# Altium PCB VlakecDuplo.PcbDoc
Units mm, origin at the board's own origin, x right, y up, seen from the top; angles counter-clockwise.
Board outline 27 x 30 mm, 2 copper layers (Top Layer, Bottom Layer); 26 components, 24 nets, 102 pads, 25 vias.
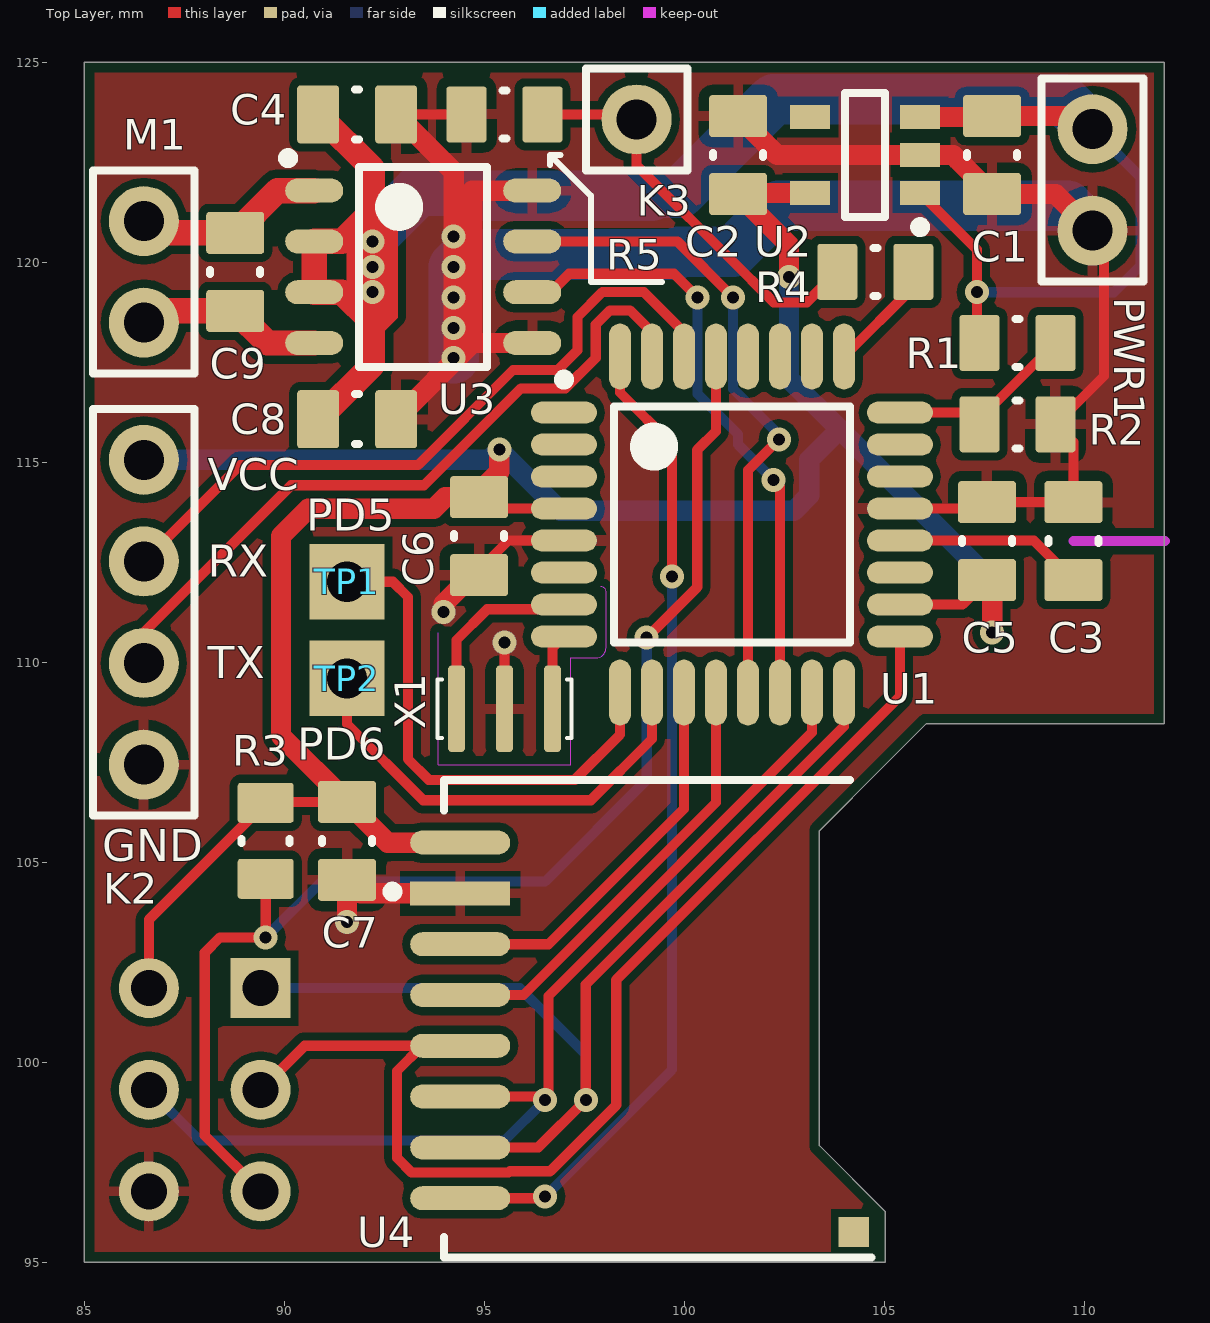
[diagram p0: Top Layer view]
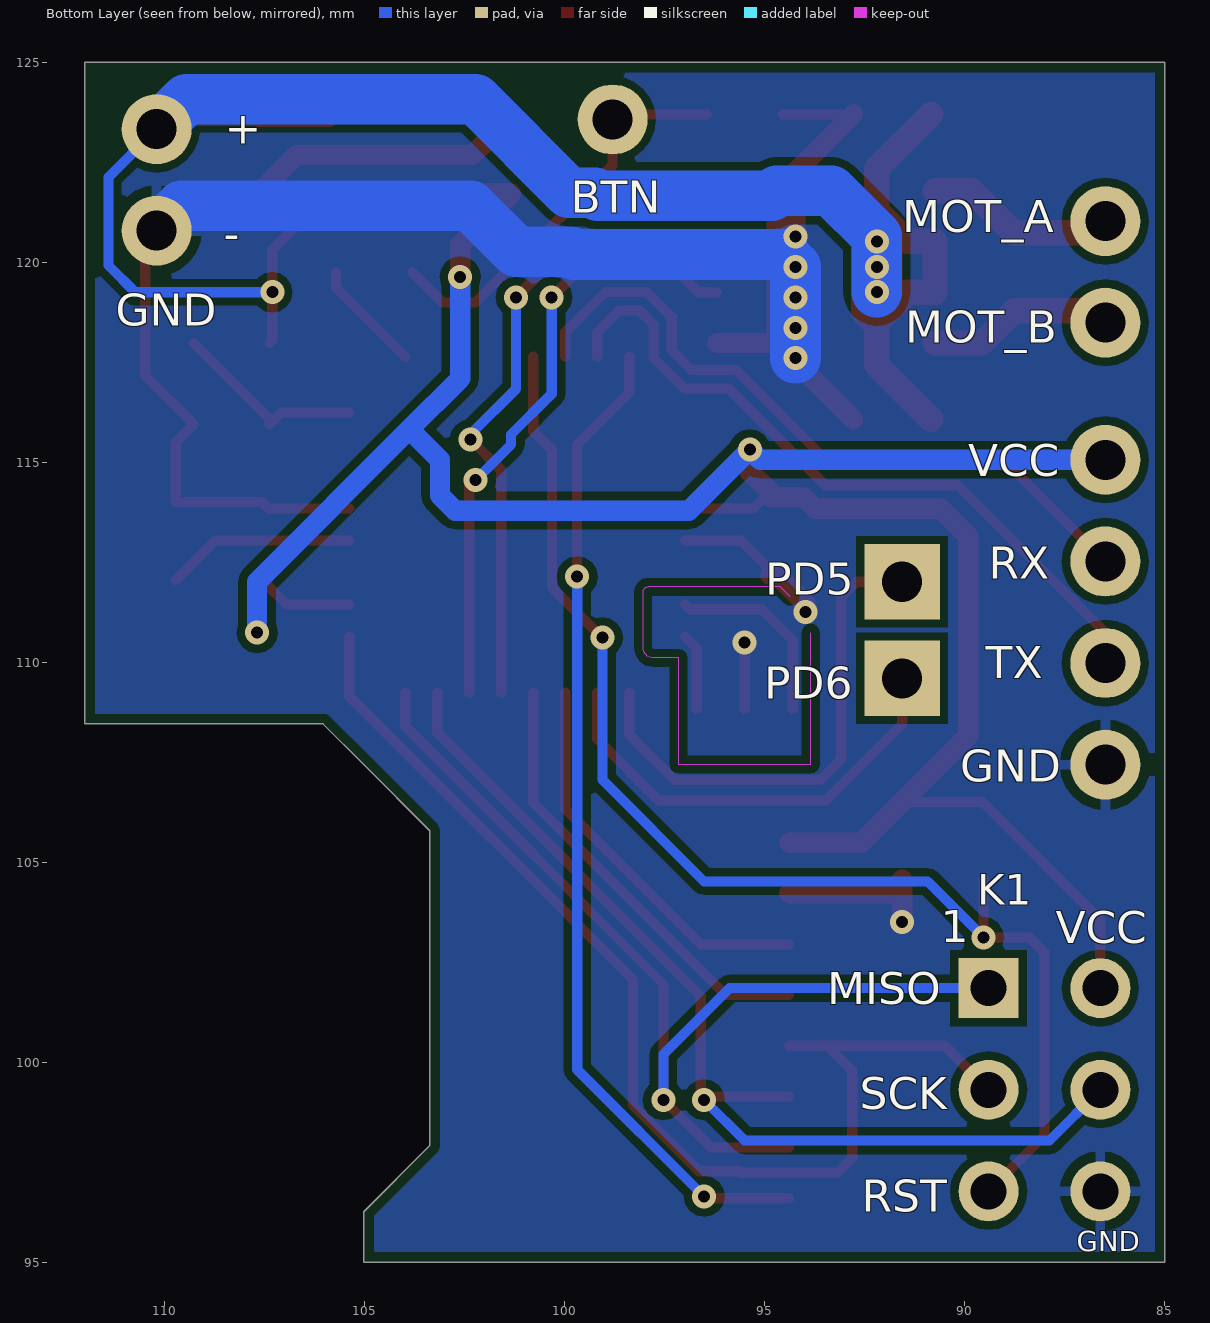
[diagram p1: Bottom Layer view, seen from below]

## Layer stack, top to bottom
Top Solder: solder mask 0.0102, Solder Resist, Dk 3.5
Top Layer: signal copper 0.0356
Dielectric 1: dielectric 0.32, FR-4, Dk 4.8
Bottom Layer: signal copper 0.0356
Bottom Solder: solder mask 0.0102, Solder Resist, Dk 3.5

## Board outline
85,95 85,125 112,125 112,108.458 106.045,108.458 105.029,107.442 103.378,105.791 103.378,97.917 105.029,96.266 105.029,95

## Design rules (kind name [scope] priority, off if disabled: settings)
BoardOutlineClearance [All] p1: gap=0.254 ignorepadtopadclearanceinfootprint=FALSE
Clearance [All] p1: gap=0.203 ignorepadtopadclearanceinfootprint=FALSE
ComponentClearance ComponentClearance_ISP [InComponent('K1')] p1: gap=0 collisioncheckmode=3 verticalgap=0 showdistances=FALSE
ComponentClearance [All] p2: gap=0.254 collisioncheckmode=3 verticalgap=0.254 showdistances=FALSE
HoleSize [All] p1: absolutevalues=TRUE maxlimit=25.4 minlimit=0.025 maxpercent=80.000 minpercent=20.000
HoleToHoleClearance [All] p1: gap=0.152 allowstackedmicrovias=TRUE
MinimumSolderMaskSliver [All] p1: minsoldermaskwidth=0.152
PolygonConnect [All] p1: thpad.connectstyle=Relief thpad.reliefconductorwidth=0.254 thpad.reliefentries=4 thpad.polygonreliefangle="90 Angle" thpad.airgapwidth=0.254 smdpad.connectstyle=Relief smdpad.reliefconductorwidth=0.254 smdpad.reliefentries=4 smdpad.polygonreliefangle="90 Angle" smdpad.airgapwidth=0.254 via.connectstyle=Direct via.reliefconductorwidth=0.254 via.reliefentries=4 via.polygonreliefangle="90 Angle" via.airgapwidth=0.254
RoutingVias [All] p1: holewidth=0.3 width=0.6 viastyle="Through Hole" minholewidth=0.3 minwidth=0.6 maxholewidth=0.711 maxwidth=1.27
SilkToSilkClearance [All] p1: silktosilkclearance=0.152
SilkToSolderMaskClearance [IsPad] p1: minsilkscreentomaskgap=0.152 clearancetoexposedcopper=TRUE
SolderMaskExpansion [All] p1: expansion=0.102
Width [All] p1: maxlimit=1.27 minlimit=0.254 preferedwidth=0.254
24 further rules are at their usual default settings.

## Components (designator, comment, footprint, x,y, rotation, side; value= is the part's Value field where it differs from the comment)
C1 "1u" C0805(2012)_N 107.696,122.682 r270 top
C2 "1u" C0805(2012)_N 101.346,122.682 r90 top
C3 "100n" C0805(2012)_N 109.728,113.03 r90 top
C4 "2.2u" C0805(2012)_N 91.821,123.698 r0 top
C5 "100n" C0805(2012)_N 107.569,113.03 r90 top
C6 "100n" C0805(2012)_N 94.869,113.157 r270 top
C7 "2.2u" C0805(2012)_N 91.567,105.537 r270 top
C8 "2.2u" C0805(2012)_N 91.821,116.078 r0 top
C9 "100n" C0805(2012)_N 88.773,119.761 r270 top
K1 "H2x3" H2X3_SPEEDY 89.281,101.854 r270 bottom
K2 "H1x4" H1x4 86.487,115.062 r90 top
K3 "H1x1" H1x1 98.806,123.571 r0 top
M1 "H1x2" H1x2 86.487,121.031 r90 top
PWR1 "H1x2" H1x2 110.205,123.33 r90 top
R1 "10k" R0805(2012)_N 108.331,117.983 r0 top
R2 "3k" R0805(2012)_N 108.331,115.951 r0 top
R3 "100k" R0805(2012)_N 89.535,105.537 r90 top
R4 "330" R0805(2012)_N 104.775,119.761 r0 top
R5 "10k" R0805(2012)_N 95.504,123.698 r180 top
TP1 "PD5" PAD_HOLE 91.567,112.014 r0 top
TP2 "PD6" PAD_HOLE 91.567,109.601 r0 top
U1 "ATmega328PB-AU" 32A_N 101.191,113.444 r0 top
U2 "MIC5504-3.3" SOT23-5 104.521,122.682 r180 top
U3 "L9110" SOP-8 93.472,119.888 r0 top
U4 "NRF24L01+" NRF24L01+smd_module 102.997,101.092 r0 top
X1 "8MHz" RESONATOR_3213met_L 95.504,108.839 r180 top

## Footprints (in the part's own frame and the unit in brackets; to place one, negate y for a bottom-side part, rotate by r counter-clockwise, add the part's x,y. Pads: shape width x height; smd on the part's side, far side on the other; paste and mask are expansions set on the pad)
32A_N [mm]
  oval 1.65x0.55 smd: 1(-4.2,2.8) 2(-4.2,2) 3(-4.2,1.2) 4(-4.2,0.4) 5(-4.2,-0.4) 6(-4.2,-1.2) 7(-4.2,-2) 8(-4.2,-2.8) 17(4.2,-2.8) 18(4.2,-2) 19(4.2,-1.2) 20(4.2,-0.4) 21(4.2,0.4) 22(4.2,1.2) 23(4.2,2) 24(4.2,2.8)
  oval 0.55x1.65 smd: 9(-2.8,-4.2) 10(-2,-4.2) 11(-1.2,-4.2) 12(-0.4,-4.2) 13(0.4,-4.2) 14(1.2,-4.2) 15(2,-4.2) 16(2.8,-4.2) 25(2.8,4.2) 26(2,4.2) 27(1.2,4.2) 28(0.4,4.2) 29(-0.4,4.2) 30(-1.2,4.2) 31(-2,4.2) 32(-2.8,4.2)
  silkscreen extent -4.32,-2.95 2.95,3.75, body extent -3.5,-3.5 3.5,3.5, height 1.2
C0805(2012)_N [mm] "Chip Capacitor, 2-Leads, Body 2.05x1.25mm, IPC Medium Density"
  rrect15% 1.05x1.45 smd: 1(-0.975,0) 2(0.975,0)
  silkscreen extent -0.05,-0.63 0.05,0.63, body extent -1.1,-0.7 1.1,0.7, height 1.4
H1x1 [mm]
  round 1.75 hole 1: 1(0,0)
  silkscreen extent -1.27,-1.27 1.27,1.27, body extent -1.27,-1.27 1.27,1.27, height 8.4
H1x2 [mm]
  round 1.75 hole 1: 1(0,0) 2(-2.54,0)
  silkscreen extent -3.81,-1.27 1.27,1.27, body extent -3.81,-1.27 1.27,1.27, height 8.4
H1x4 [mm]
  round 1.75 hole 1: 1(0,0) 2(-2.54,0) 3(-5.08,0) 4(-7.62,0)
  silkscreen extent -8.89,-1.27 1.27,1.27, body extent -8.89,-1.27 1.27,1.27, height 8.4
H2X3_SPEEDY [mm]
  rect 1.5x1.5 hole 0.9: 1(0,-0.127)
  round 1.5 hole 0.9: 2(0,2.667) 3(2.54,-0.127) 4(2.54,2.667) 5(5.08,-0.127) 6(5.08,2.667)
  body extent -5.08,-3.18 10.16,6.02, height 9.45
NRF24L01+smd_module [mm]
  rect 2.5x0.6 smd: 1(-8.6,3.131)
  oval 2.5x0.6 smd: 2(-8.6,4.401) 3(-8.6,1.861) 4(-8.6,0.591) 5(-8.6,-0.679) 6(-8.6,-1.949) 7(-8.6,-3.219) 8(-8.6,-4.489)
  rect 0.762x0.762 smd: 9(1.245,-5.334)
  silkscreen extent -10.42,-5.97 1.68,5.97, body extent -9,-6 9,6, height 0.8
PAD_HOLE [mil]
  rect 74x74 hole 39.4: 1(0,0)
R0805(2012)_N [mm] "Chip Resistor, 2-Leads, Body 2.05x1.25mm, IPC Medium Density"
  rrect15% 1x1.4 smd: 1(-0.95,0) 2(0.95,0)
  silkscreen extent -0.05,-0.6 0.05,0.6, body extent -1.1,-0.7 1.1,0.7, height 0.8
RESONATOR_3213met_L [mm] "Oscillator, Side Concave, 1.20 mm pitch; 6 pin, 3.20 mm L X 1.30 mm W X 0.80 mm H body"
  rrect51% 0.43x2.17 smd: 1(-1.2,0) 2(0,0) 3(1.2,0)
  silkscreen extent -1.68,-0.73 1.68,0.73, body extent -1.6,-0.7 1.6,0.7, height 0.8
SOP-8 [mm] "SOIC, 8-Leads, Body 4.90x3.90mm, Pitch 1.27mm, IPC Medium Density"
  oval 1.45x0.6 smd: 1(-2.725,1.905) 2(-2.725,0.635) 3(-2.725,-0.635) 4(-2.725,-1.905) 5(2.725,-1.905) 6(2.725,-0.635) 7(2.725,0.635) 8(2.725,1.905)
  silkscreen extent -3.5,-2.5 1.6,2.84, body extent -3,-2.5 3,2.5, height 1.75
SOT23-5 [mm] "SOT23, 5-Leads, Body 2.98x2.75mm, Pitch 0.95mm, IPC Medium Density"
  rect 1x0.6 smd: 1(-1.375,0.95) 2(-1.375,0) 3(-1.375,-0.95) 4(1.375,-0.95) 5(1.375,0.95)
  silkscreen extent -1.5,-1.55 0.5,1.92, body extent -1.5,-1.55 1.5,1.55, height 1.4

## Part data
C1 C2 C3 C4 C5 C6 C7 C8 C9: library part C, "Capacitor"
K1: "Header 2x3 (male)"
K2: "Header 1x4 (male)"
K3: "Header 1x1 (male)"
M1 PWR1: "Header 1x2 (male)"
R1 R2 R3 R4 R5: library part R, "R"
TP1 TP2: library part PAD, "PAD"
U1: "8-bit AVR Microcontroller, 32KB Flash, 1KB EEPROM, 2KB SRAM, 32-pin TQFP, Industrial Grade (-40°C to 85°C)", Code_JEDEC=MS-026-ABA, ComponentLink1Description="Manufacturer URL", ComponentLink1URL=http://www.atmel.com/, ComponentLink2Description="ATmega328PB Datasheet", ComponentLink2URL=http://www.atmel.com/Images/Atmel-42397-8-bit-AVR-Microcontroller-ATmega328PB_Datasheet.pdf, ComponentLink3Description="ATmega328P Summary", ComponentLink3URL=http://www.atmel.com/Images/Atmel-42397-8-bit-AVR-Microcontroller-ATmega328PB_Summary.pdf, DatasheetVersion="revC, Oct-2015", PackageDescription="32-Lead, 7x7x1.0 mm Body, 0.8mm Lead Pitch, Thin Profile Plastic Quad Flat Package (TQFP)", PackageReference=32A
U2: Supplier Part Number 1=2510377, Supplier 1=Farnell
X1: library part ResonatorWCaps, "Crystal", Supplier Part Number 1=2470360, Supplier 1=Farnell

## Via types
v1: diameter 0.6, hole 0.3, Top Layer to Bottom Layer, tented both sides, 25 vias

## Nets (pads, with @x,y where several pads share a name; then routed paths per layer and width w, separated by ;. In a path a pad name is that pad's centre, name@x,y a point inside that pad or via, vN(x,y) a via of type N, cw(c..) or ccw(c..) an arc to the next point about the centre after c; other vN are vias at no path point)
AREF: C3.1 U1.20 | length 4.7
  Top Layer w0.254: U1.20 108.739,113.044 C3.1
BTN: R4.2 U1.25 | length 2.8
  Top Layer w0.254: U1.25 105.725,119.378 R4.2
CE: U1.11 U4.3 | length 9.9
  Top Layer w0.254: U4.3 96.603,102.953 99.991,106.341 U1.11
GND: C1.2 C2.2 C3.2 C4.2 C5.2 C6.2 C7.2 C8.2 K1.6 K2.4 PWR1.2 R2.2 R5.2 U1.5 U1.21 U2.2 U3.5 U3.8 U4.1 X1.2 | length 68.7
  Top Layer w0.254: C4.2 R5.2 ; C6.2@94.869,112.309 95.604,113.044 U1.5 ; X1.2 v1(95.504,110.49) ; U1.21 107.408,113.844 C5.2 C3.2 109.728,115.504 R2.2 110.49,117.16 110.49,120.505 PWR1.2
  Top Layer w0.508: v1(91.567,103.505) C7.2 91.906,104.223 U4.1 ; C8.2 94.701,117.983 ; C4.2 94.234,122.26 v1(94.234,120.65) v1(94.234,119.888) v1(94.234,119.126) v1(94.234,118.364) v1(94.234,117.602) ; v1(93.98,111.252) 93.98,111.465 94.783,112.268 C6.2 ; U3.5 94.701,117.983 ; U3.8 94.701,121.793 94.701,117.983 ; C2.2 102.321,122.682 U2.2 106.721,122.682 C1.2 109.288,121.707 PWR1.2
  Bottom Layer w1.27: v1(94.234,117.602) v1(94.234,118.364) v1(94.234,119.126) v1(94.234,119.888) 94.539,120.193 99.787,120.193 99.859,120.264 101.214,120.264 102.362,121.412 109.583,121.412 PWR1.2
InA: U1.14 U3.6 | length 15.3
  Top Layer w0.254: U3.6 96.664,119.253 97.124,119.714 99.742,119.714 v1(100.33,119.126) ; v1(102.235,114.554) 102.391,114.398 U1.14
  Bottom Layer w0.254: v1(100.33,119.126) 100.33,116.713 101.346,115.697 101.346,115.443 v1(102.235,114.554)
InB: U1.13 U3.7 | length 16.3
  Top Layer w0.254: U3.7 99.824,120.523 101.219,119.128 v1(101.219,119.126) ; U1.13 101.591,114.801 102.36,115.57 v1(102.362,115.57)
  Bottom Layer w0.254: v1(101.219,119.126) 101.219,116.84 102.362,115.697 v1(102.362,115.57)
IRQ: U1.32 U4.8 | length 25
  Top Layer w0.254: U4.8 96.476,96.603 v1(96.52,96.647) ; U1.32 98.391,116.747 99.695,115.443 v1(99.695,112.141)
  Bottom Layer w0.254: v1(96.52,96.647) 99.69,99.817 v1@99.69,112.141
MISO: K1.1 U1.16 U4.7 | length 26.4
  Top Layer w0.254: U4.7 96.349,97.873 v1(97.536,99.06) 97.536,101.946 103.991,108.401 U1.16
  Bottom Layer w0.254: K1.1 95.885,101.854 97.536,100.203 v1(97.536,99.06)
MOSI: K1.4 U1.15 U4.6 | length 25.9
  Top Layer w0.254: U4.6 96.603,99.143 96.603,101.66 103.191,108.248 U1.15
  Bottom Layer w0.254: K1.4 87.884,98.044 95.504,98.044 v1(96.52,99.06)
nCS: U1.12 U4.4 | length 11.1
  Top Layer w0.254: U4.4 95.98,101.683 100.791,106.494 U1.12
NetU1_7: U1.7 X1.3 | length 4.8
  Top Layer w0.254: X1.3 94.304,110.56 95.071,111.327 96.874,111.327 U1.7
NetU1_8: U1.8 X1.1 | length 1.9
  Top Layer w0.254: X1.1 96.704,110.357 U1.8
OutA: C9.1 M1.1 U3.1 | length 4.8
  Top Layer w0.635: M1.1 86.782,120.736 C9.1 89.83,121.793 U3.1
OutB: C9.2 M1.2 U3.4 | length 4.7
  Top Layer w0.635: M1.2 86.782,118.786 C9.2 89.576,117.983 U3.4
PD5: TP1.1 U1.9 | length 12.8
  Top Layer w0.254: TP1.1 92.71,112.014 93.091,111.633 93.091,107.581 93.611,107.061 97.259,107.061 98.391,108.193 U1.9
PD6: TP2.1 U1.10 | length 11.4
  Top Layer w0.254: TP2.1 91.567,108.458 93.472,106.553 97.663,106.553 99.191,108.081 U1.10
PWR: C1.1 C4.1 C8.1 PWR1.1 R1.1 U2.1 U2.3 U3.2 U3.3 | length 49.2
  Top Layer w0.254: U2.1 107.315,120.313 v1(107.315,119.253) 107.315,118.049 R1.1
  Top Layer w0.508: U2.3 107.671,123.632 C1.1 109.878,123.657 PWR1.1
  Top Layer w0.635: C8.1 92.202,117.434 92.202,118.491 91.44,119.253 U3.3 U3.2 91.44,120.523 92.202,121.285 92.202,122.342 C4.1
  Bottom Layer w0.254: v1(107.315,119.253) 110.744,119.253 111.41,119.919 111.41,122.125 PWR1.1 ; 107.315,124.079 107.381,124.013
  Bottom Layer w1.27: v1(92.202,119.253) v1(92.202,119.888) v1(92.202,120.523) 92.202,120.65 93.34,121.788 94.705,121.788 94.828,121.666 99.177,121.666 99.248,121.737 99.893,121.737 102.235,124.079 107.315,124.079 109.456,124.079 PWR1.1
PWR_SENS: R1.2 R2.1 U1.24 | length 4.9
  Top Layer w0.254: U1.24 107.088,116.244 R2.1 107.381,116.083 R1.2
RST: K1.5 R3.1 U1.29 | length 32.1
  Top Layer w0.254: K1.5 88.011,98.171 88.011,102.743 88.392,103.124 v1(89.535,103.124) R3.1 ; v1(99.06,110.617) 99.062,110.617 100.325,111.88 100.325,115.311 100.791,115.777 U1.29
  Bottom Layer w0.254: v1(89.535,103.124) 90.932,104.521 96.52,104.521 99.06,107.061 v1(99.06,110.617)
RX: K2.2 U1.30 | length 17.8
  Top Layer w0.254: K2.2 88.9,114.935 93.345,114.935 95.716,117.306 96.837,117.306 97.329,117.798 97.329,118.634 97.951,119.256 98.984,119.256 99.991,118.25 U1.30
SCK: K1.3 U1.17 U4.5 | length 29.5
  Top Layer w0.254: K1.3 90.507,100.413 U4.5@93.447,100.413 ; U4.5 U4.5@93.447,100.413 ; U1.17 105.391,109.155 98.298,102.062 98.298,98.931 96.644,97.277 95.642,97.277 95.608,97.243 93.186,97.243 92.817,97.612 92.817,99.783 U4.5@93.447,100.413
TIPKA: K3.1 R4.1 R5.1 | length 10.3
  Top Layer w0.254: R5.1 98.679,123.698 K3.1 98.806,122.428 101.478,119.756 101.48,119.756 101.849,119.387 101.849,119.385 102.235,118.999 103.063,118.999 R4.1
TX: K2.3 U1.31 | length 18.1
  Top Layer w0.254: K2.3 86.487,110.744 90.17,114.427 93.493,114.427 95.915,116.849 97.026,116.849 97.786,117.609 97.786,118.445 98.14,118.799 98.642,118.799 99.191,118.25 U1.31
VCC: C2.1 C5.1 C6.1 C7.1 K1.2 K2.1 R3.2 U1.4 U1.18 U2.5 U4.2 | length 66.2
  Top Layer w0.254: K1.2 86.614,103.566 R3.2 89.56,106.512 C7.1 ; C6.1@94.869,114.259 95.284,113.844 U1.4 ; U1.18 106.958,111.444 C5.1
  Top Layer w0.508: U4.2 92.586,105.493 C7.1 89.916,108.163 89.916,113.157 90.602,113.843 93.735,113.843 94.024,114.132 C6.1 94.869,114.259 95.377,114.767 v1(95.377,115.316) ; v1(102.616,119.634) 102.616,120.437 C2.1 101.371,121.732 U2.5 ; C5.1 107.696,111.928 v1(107.696,110.744)
  Bottom Layer w0.508: K2.1 95.123,115.062 v1(95.377,115.316) 96.901,113.792 102.743,113.792 103.124,114.173 103.124,115.062 103.886,115.824 ; v1(102.616,119.634) 102.616,117.094 103.886,115.824 ; v1(107.696,110.744) 107.696,112.014 103.886,115.824
pads on no net: U1.1 U1.2 U1.3 U1.6 U1.19 U1.22 U1.23 U1.26 U1.27 U1.28 U2.4 U4.9

## Polygon pours and split planes (outlines as drawn)
GND on Top Layer "BOT GND" (solid, remove dead copper, pour order 6): 85,95 85,125 112,125 112,108.458 106.045,108.458 105.029,107.442 103.378,105.791 103.378,97.917 105.029,96.266 105.029,95
GND on Bottom Layer "BOT GND" (solid, remove dead copper, pour order 8): 85,95 85,125 112,125 112,108.458 106.045,108.458 105.029,107.442 103.378,105.791 103.378,97.917 105.029,96.266 105.029,95

## Keep-outs
Top Layer:
  lines w0.254: 109.728,113.03 112.014,113.03
Bottom Layer:
  lines w0.025: 94.361,111.633 94.615,111.887 97.917,111.887
Keep-Out Layer:
  lines w0.025: 93.853,110.744 93.853,107.442 97.155,107.442 97.155,110.109 97.79,110.109 ccw(c97.79,110.363) 98.044,110.363 98.044,111.76 ccw(c97.917,111.76) 97.917,111.887

## Other copper
Top Layer:
  region net PWR: 91.567,120.904 91.567,118.872 92.202,118.237 92.456,118.237 92.837,118.618 92.837,121.158 92.456,121.539 92.202,121.539

## Silkscreen, mask and mechanical layers (free items; w line width, h text height)
Top Overlay:
  lines w0.152: 96.647,122.428 96.647,122.682 ; 96.901,122.682 96.647,122.682 ; 97.663,119.761 97.663,119.507 ; 99.441,119.507 97.663,119.507 ; 96.647,122.682 97.663,121.666 97.663,119.507
  text "VCC" at 88.087,114.3 h0.8
  text "RX" at 88.087,112.141 h0.8
  text "TX" at 88.087,109.601 h0.8
  text "GND" at 85.446,105.029 h0.8
Bottom Overlay:
  text "+" at 108.509,122.961 h0.8
  text "BTN" at 99.847,121.234 h0.8
  text "MOT_A" at 91.567,120.752 h0.8
  text "-" at 108.534,120.32 h0.8
  text "GND" at 111.227,118.415 h0.8
  text "MOT_B" at 91.491,117.983 h0.8
  text "VCC" at 89.916,114.656 h0.8
  text "RX" at 89.408,112.09 h0.8
  text "PD5" at 94.996,111.684 h0.8
  text "TX" at 89.484,109.601 h0.8
  text "PD6" at 95.021,109.093 h0.8
  text "GND" at 90.119,107.01 h0.8
  text "VCC" at 87.732,102.972 h0.8
  text "MISO" at 93.447,101.448 h0.8
  text "SCK" at 92.634,98.831 h0.8
  text "RST" at 92.583,96.266 h0.8
  text "GND" at 87.198,95.275 h0.5
Top Solder:
  rectangle: 105.308,121.945 106.477,123.317
  rectangle: 98.196,116.865 104.14,118.415
  rectangle: 104.623,110.465 106.172,116.281
  rectangle: 98.222,108.458 103.937,110.058
  rectangle: 96.139,110.592 97.841,116.332
Board Outline:
  the board outline again, w0.254

## Text inside footprints (layer, text, board x,y; h text height)
K1: Bottom Overlay "1" at 90.602,102.997 h0.8